# EAGLE board Spectra Mirror Bottom Board Final (EAGLE 6.5.0)
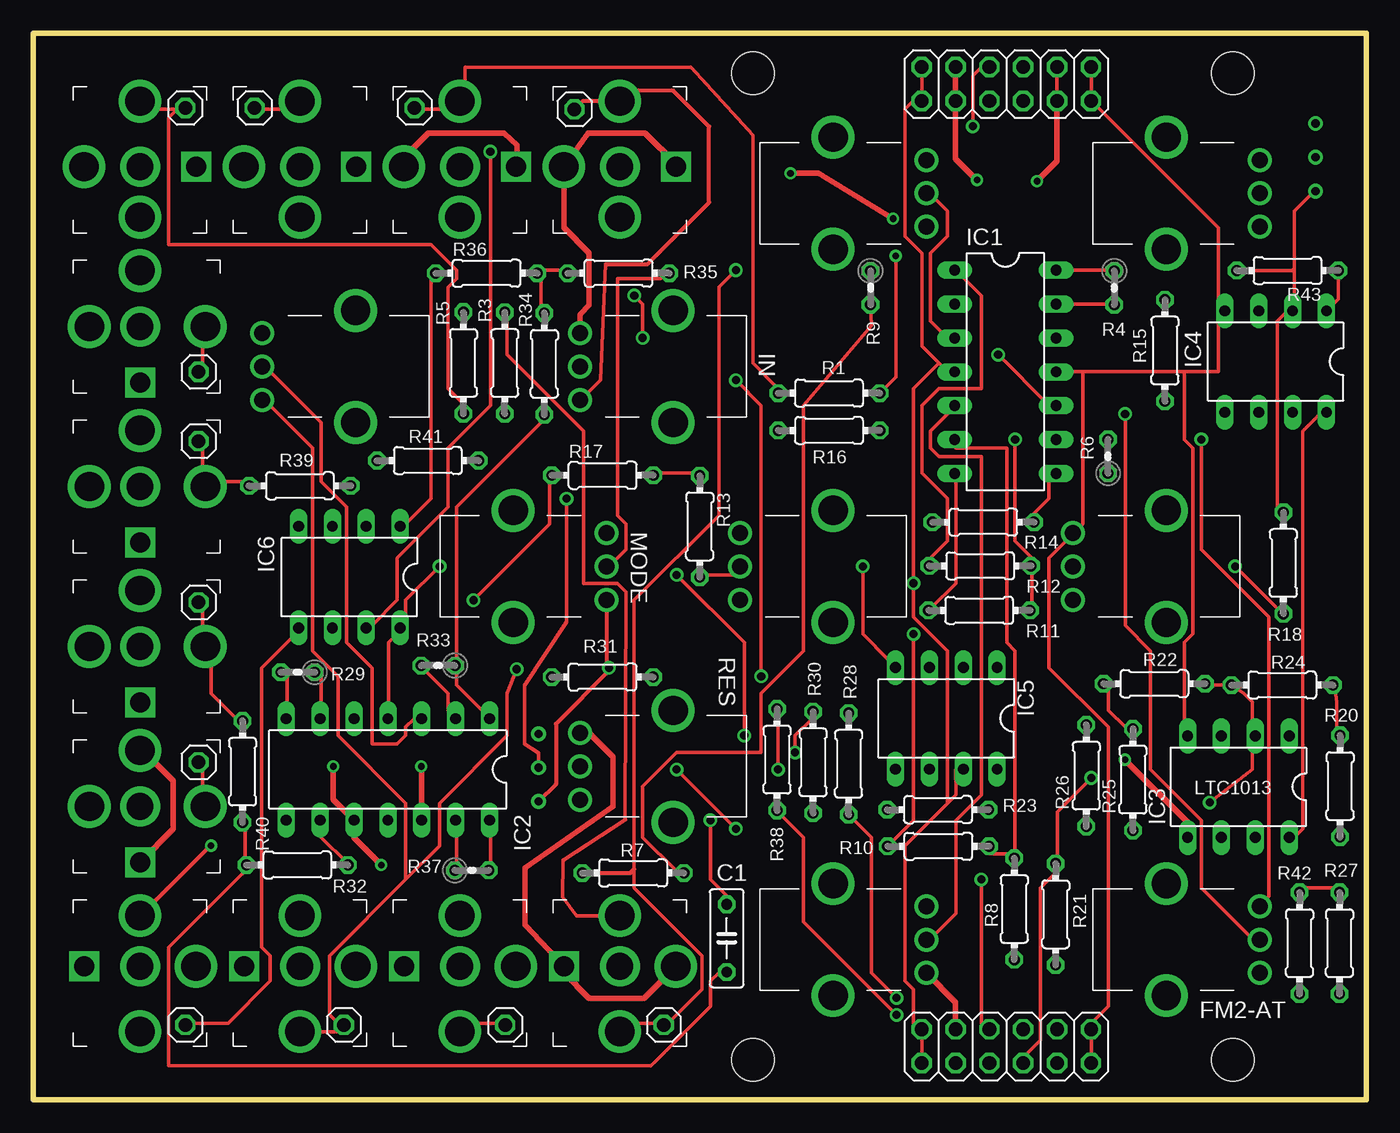
[diagram p0: board, top side]
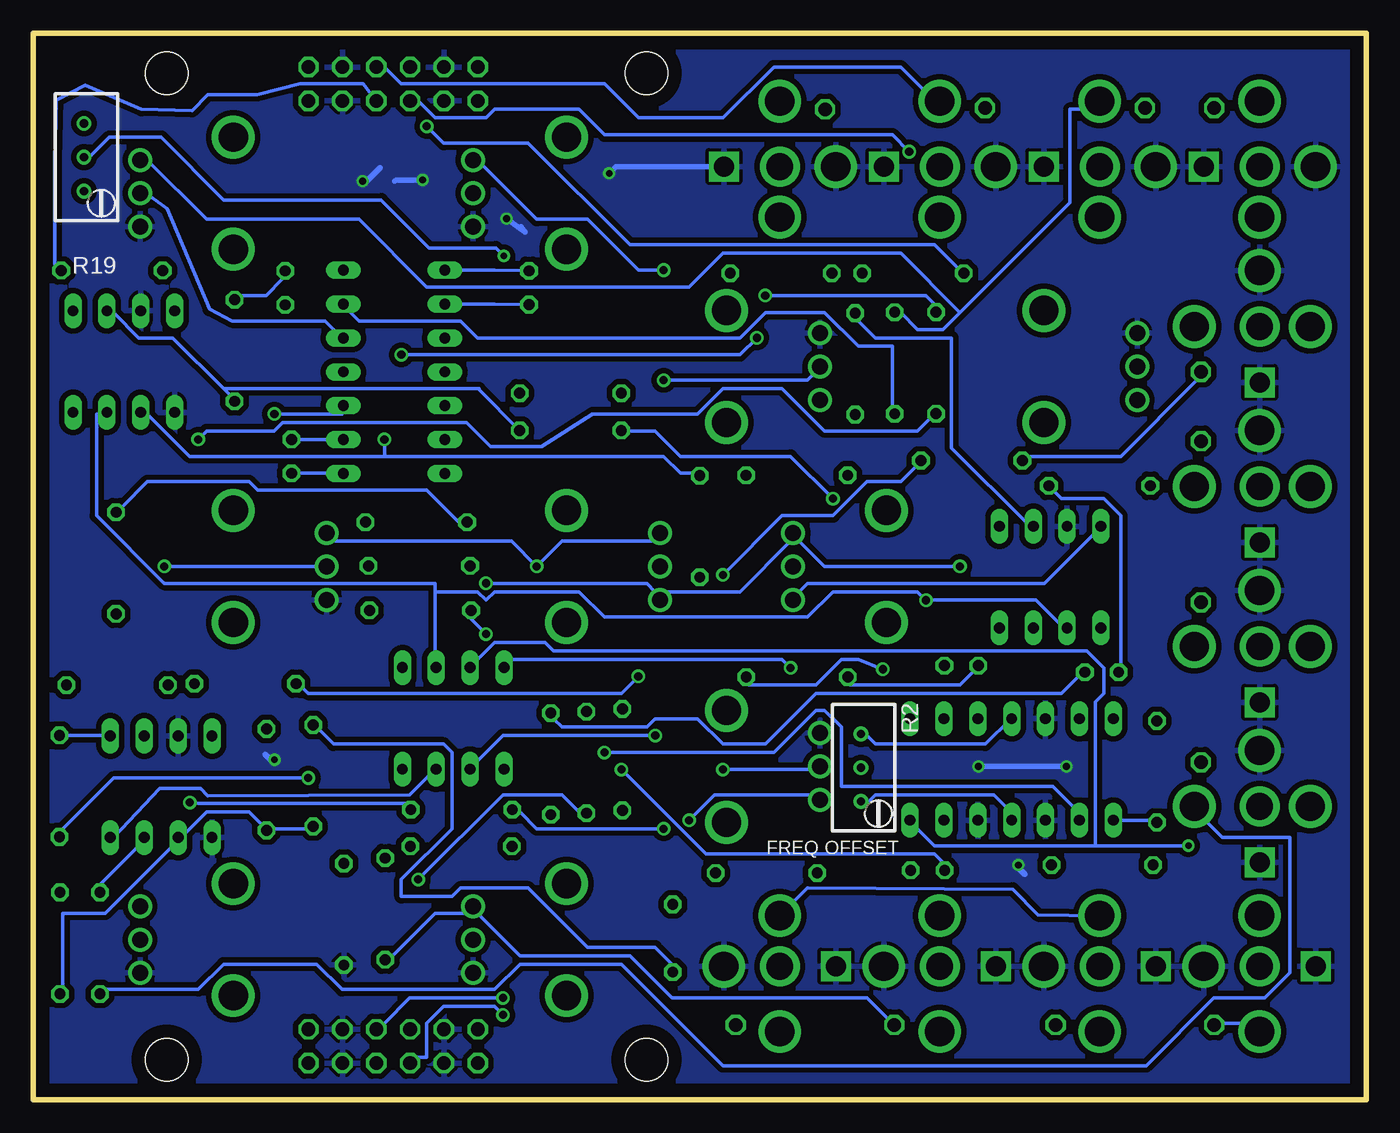
[diagram p1: board, bottom side, seen from below]

Size 100 x 80 mm. Coordinates in mm from the lower left corner, seen from the top.
Outline: 0,80 0,0 100,0 100,80 0,80
Copper layers (1*16): Top 0.035mm / dielectric 1.5mm / Bottom 0.035mm
Design rules "default *": minimum track width 10mil, minimum drill 24mil, track to track 8mil, track to pad 8mil, pad to pad 8mil, via to via 8mil, smd to smd 8mil, copper to edge 40mil, drill to drill 8mil, minimum pad ring 10mil, minimum via ring 8mil, stop-mask expansion 4mil, vias tented up to drill 25mil, thermal gap 10mil
Holes 3.2 mm at 54,3 90,3 54,77 90,77

## Footprints (pad centres in the part's own frame; a part is rotated, then mirrored left to right if it is on the bottom)
C050-025X075 = drill 0.813 octagon: 1 -2.54,0; 2 2.54,0
ALPHAPOT_BOARDMOUNT = drill 1.2: LEFT -2.5,7; MID 0,7; RIGHT 2.5,7 | drill 2.2: LEFT-LEG -4.2,0; RIGHT-LEG 4.2,0
DIL14 = drill 0.813 long: 1 -7.62,-3.81; 2 -5.08,-3.81; 3 -2.54,-3.81; 4 0,-3.81; 5 2.54,-3.81; 6 5.08,-3.81; 7 7.62,-3.81; 8 7.62,3.81; 9 5.08,3.81; 10 2.54,3.81; 11 0,3.81; 12 -2.54,3.81; 13 -5.08,3.81; 14 -7.62,3.81
DIL08 = drill 0.813 pad 1.27 long: 1 -3.81,-3.81; 2 -1.27,-3.81; 3 1.27,-3.81; 4 3.81,-3.81; 5 3.81,3.81; 6 1.27,3.81; 7 -1.27,3.81; 8 -3.81,3.81
2X06 = drill 1.016 octagon: 1 -6.35,-1.27; 2 -6.35,1.27; 3 -3.81,-1.27; 4 -3.81,1.27; 5 -1.27,-1.27; 6 -1.27,1.27; 7 1.27,-1.27; 8 1.27,1.27; 9 3.81,-1.27; 10 3.81,1.27; 11 6.35,-1.27; 12 6.35,1.27
1X01 = drill 1.016 octagon: 1 0,0
0204/7 = drill 0.813 octagon: 1 -3.81,0; 2 3.81,0
RTRIMT93YA = drill 0.61: 1 0,-2.54; 2 0,0; 3 0,2.54
0204V = drill 0.813 octagon: 1 -1.27,0; 2 1.27,0
KOBICONPJ-301 = drill 1.5 pad 1.778 square: GND 4.2,0 | drill 2.2 pad 2.54: GND2 -4.2,0; IN 0,4.9; SWITCH 0,-3.8 | drill 2 pad 2.54: P$1 0,0

## Placement (x,y rotation side)
C1  10n  [C050-025X075]  52.02,12.1 90 top
COURSE  B100k  [ALPHAPOT_BOARDMOUNT]  85,40 90 top
FM1-AT  B100k  [ALPHAPOT_BOARDMOUNT]  85,68 270 top
FM2-AT  B100k  [ALPHAPOT_BOARDMOUNT]  85,12 270 top
IC1  TL074P  [DIL14]  72.93,54.6 270 top
IC2  TL074P  [DIL14]  26.6,24.77 180 top
IC3  TL072P  [DIL08]  90.41,23.47 180 top
IC4  TL072P  [DIL08]  93.21,55.37 180 top
IC5  TL071P  [DIL08]  68.5,28.6 180 top
IC6  TL072P  [DIL08]  23.71,39.2 180 top
IN  B100k  [ALPHAPOT_BOARDMOUNT]  48,55 90 top
JP1  [2X06]  73,76.2 0 top
JP2  [2X06]  73,4 0 top
JP3  [1X01]  12.4,25.3 0 top
JP4  [1X01]  40.6,74.3 0 top
JP5  [1X01]  16.6,74.4 0 top
JP6  [1X01]  28.6,74.4 0 top
JP7  [1X01]  11.4,74.4 0 top
JP8  [1X01]  47.3,5.6 0 top
JP9  [1X01]  35.4,5.6 0 top
JP10  [1X01]  23.3,5.6 0 top
JP11  [1X01]  12.4,54.6 0 top
JP12  [1X01]  12.4,37.3 0 top
JP13  [1X01]  12.4,49.4 0 top
JP14  [1X01]  11.4,5.6 0 top
MODE  B100k  [ALPHAPOT_BOARDMOUNT]  36,40 270 top
MODE-AT  B100K  [ALPHAPOT_BOARDMOUNT]  24.18,55 90 top
PW  B100k  [ALPHAPOT_BOARDMOUNT]  60,40 90 top
PWM1-AT  B100k  [ALPHAPOT_BOARDMOUNT]  60,68 270 top
PWM2-AT  B100k  [ALPHAPOT_BOARDMOUNT]  60,12 270 top
R1  150k  [0204/7]  59.7,53 180 top
R2  100k  [RTRIMT93YA]  37.9,24.9 180 bottom
R3  220k  [0204/7]  35.37,55.26 90 top
R4  220k  [0204V]  81.1,60.9 270 top
R5  220k  [0204/7]  32.27,55.27 270 top
R6  220k  [0204V]  80.63,48.26 90 top
R7  220k  [0204/7]  45,17 180 top
R8  220k  [0204/7]  73.6,14.3 270 top
R9  220k  [0204V]  62.81,60.91 270 top
R10  220k  [0204/7]  67.9,19 0 top
R11  100k  [0204/7]  70.97,36.7 180 top
R12  100k  [0204/7]  71.04,40.04 180 top
R13  220k  [0204/7]  50,43 270 top
R14  100k  [0204/7]  71.27,43.32 0 top
R15  100k  [0204/7]  84.9,56.2 90 top
R16  100k  [0204/7]  59.7,50.2 180 top
R17  220k  [0204/7]  42.71,46.84 0 top
R18  100k  [0204/7]  93.79,40.25 90 top
R19  300k  [RTRIMT93YA]  96.2,70.7 180 bottom
R20  22k  [0204/7]  98.04,23.52 270 top
R21  1k  [0204/7]  76.7,13.9 270 top
R22  100k  [0204/7]  84.1,31.2 180 top
R23  100k  [0204/7]  67.87,21.75 180 top
R24  100k  [0204/7]  93.7,31.1 180 top
R25  100k  [0204/7]  82.5,24 90 top
R26  100k  [0204/7]  79,24.3 90 top
R27  100k  [0204/7]  98,11.73 270 top
R28  1k  [0204/7]  61.17,25.19 90 top
R29  22k  [0204V]  19.84,32.06 180 top
R30  1k  [0204/7]  58.5,25.3 90 top
R31  220k  [0204/7]  42.7,31.7 0 top
R32  220k  [0204/7]  19.8,17.6 180 top
R33  220k  [0204V]  30.37,32.56 180 top
R34  100k  [0204/7]  38.34,55.2 270 top
R35  220k  [0204/7]  43.9,62 0 top
R36  220k  [0204/7]  34,62 0 top
R37  100k  [0204V]  32.9,17.2 0 top
R38  22k  [0204/7]  55.8,25.5 90 top
R39  1k  [0204/7]  20,46.05 180 top
R40  1k  [0204/7]  15.7,24.6 90 top
R41  1k  [0204/7]  29.6,47.94 180 top
R42  1k  [0204/7]  95,11.73 270 top
R43  100k  [0204/7]  94.1,62.2 180 top
RES  B100k  [ALPHAPOT_BOARDMOUNT]  48,25 90 top
U$1  KOBICONPJ-301  [KOBICONPJ-301]  44,70 0 top
U$2  KOBICONPJ-301  [KOBICONPJ-301]  32,70 0 top
U$3  KOBICONPJ-301  [KOBICONPJ-301]  20,70 0 top
U$4  KOBICONPJ-301  [KOBICONPJ-301]  8,70 0 top
U$5  KOBICONPJ-301  [KOBICONPJ-301]  8,58 270 top
U$6  KOBICONPJ-301  [KOBICONPJ-301]  8,46 270 top
U$7  KOBICONPJ-301  [KOBICONPJ-301]  8,34 270 top
U$8  KOBICONPJ-301  [KOBICONPJ-301]  8,22 270 top
U$9  KOBICONPJ-301  [KOBICONPJ-301]  8,10 180 top
U$10  KOBICONPJ-301  [KOBICONPJ-301]  20,10 180 top
U$11  KOBICONPJ-301  [KOBICONPJ-301]  32,10 180 top
U$12  KOBICONPJ-301  [KOBICONPJ-301]  44,10 180 top

## Library data of the parts
C1 R2 R19 = rcl
COURSE FM1-AT FM2-AT IN MODE MODE-AT PW PWM1-AT PWM2-AT RES U$1-U$12 = elipech_modified
IC1-IC6 = linear
JP1-JP14 = pinhead
R1 R3-R18 R20-R43 = resistor

## Nets
CLOCK-INPUT: IC6.7 JP1.5
COMP-THRESH: IC4.7 IC5.2 IC6.6 R17.1
FREQ-INPUT: IC4.1 JP1.7 R43.1
GND: COURSE.LEFT FM1-AT.RIGHT FM2-AT.RIGHT IC2.5 IC2.10 IC2.12 IC3.3 IC3.5 IC4.3 IC4.5 IC6.3 IN.RIGHT JP1.3 JP1.4 JP1.9 JP1.10 JP2.3 JP2.4 JP2.9 JP2.10 MODE-AT.RIGHT PWM1-AT.RIGHT PWM2-AT.RIGHT R21.2 RES.RIGHT U$1.GND U$1.GND2 U$2.GND U$2.GND2 U$3.GND U$3.GND2 U$4.GND U$4.GND2 U$5.GND U$5.GND2 U$6.GND U$6.GND2 U$7.GND U$7.GND2 U$8.GND U$8.GND2 U$9.GND U$9.GND2 U$10.GND U$10.GND2 U$11.GND U$11.GND2 U$12.GND U$12.GND2
KJDNFKDNF: IC1.13 R3.1 R4.2
N$1: R1.1 R19.2
N$2: R2.2 R16.2
N$4: IC5.6 R41.1
N$5: IC1.14 R4.1 R15.2
N$6: FM1-AT.MID IC1.12
N$7: FM2-AT.MID IC1.10 R5.1
N$8: IC1.9 R6.2
N$9: FM2-AT.LEFT JP7.1 R5.2 U$4.IN
N$10: IC1.8 R6.1 R14.2
N$11: JP9.1 PWM2-AT.LEFT R8.2 U$11.IN
N$12: IC1.6 R8.1 R10.2
N$13: JP8.1 PWM1-AT.LEFT R7.2 U$12.IN
N$14: IC1.2 R7.1 R9.2
N$15: IC1.1 R9.1 R12.2
N$16: IC1.3 PWM1-AT.MID
N$17: IC1.5 PWM2-AT.MID
N$18: IC1.7 R10.1 R11.2
N$19: IC4.6 R11.1 R12.1 R13.1 R17.2
N$20: PW.MID R13.2
N$21: IC4.2 R14.1 R15.1 R16.1 R18.2 R19.3 R43.2
N$22: COURSE.MID R18.1
N$24: JP10.1 MODE-AT.LEFT R31.2 U$10.IN
N$26: IN.LEFT JP4.1 U$1.IN
N$27: IN.MID R22.2 R25.2
N$28: IC3.6 R25.1 R26.1 R27.2
N$29: IC3.1 R20.1 R24.1
N$30: IC2.2 R31.1 R33.2
N$31: IC3.2 R22.1 R23.1 R24.2
N$32: IC3.7 R27.1 R42.1
N$33: R23.2 RES.MID
N$34: IC2.1 R33.1 R34.2
N$35: IC2.9 R30.2 R32.1
N$36: IC2.3 MODE-AT.MID
N$37: IC2.6 R28.2 R29.1
N$38: C1.2 RES.LEFT
N$39: IC6.2 R34.1 R35.1 R36.2
N$40: IC2.13 R37.1 R38.2
N$42: IC2.14 IC5.3 R37.2 U$9.SWITCH
N$43: MODE.MID R35.2
N$44: IC6.5 JP14.1 U$9.IN
N$45: JP11.1 R41.2 U$5.IN
N$46: JP12.1 R40.2 U$7.IN
N$47: JP13.1 R39.2 U$6.IN
N$48: JP3.1 R42.2 U$8.IN
NORMALIZE: FM1-AT.LEFT JP5.1 R3.2 U$3.IN U$10.SWITCH U$12.SWITCH
NOTE-INPUT: JP1.8 JP6.1 R1.2 U$2.IN
OSC: JP2.5 R38.1
SAH: JP2.8 R28.1
SAH-INPUT: JP2.7 R20.2 R21.1
SAH-OUT: IC2.7 R29.2 R39.1
VCA: JP2.6 R30.1
VCA-INPUT: IC6.1 JP1.6 R36.1
VCA-OUT: C1.1 IC2.8 R26.2 R32.2 R40.1
VDD: IC1.4 IC2.4 IC3.8 IC4.8 IC5.7 IC6.8 JP1.1 JP1.2 JP2.1 JP2.2 MODE.LEFT PW.LEFT R2.1
VSS: COURSE.RIGHT IC1.11 IC2.11 IC3.4 IC4.4 IC5.4 IC6.4 JP1.11 JP1.12 JP2.11 JP2.12 MODE.RIGHT PW.RIGHT R2.3

## Tracks (layer width: path | path; a pad name or v marks a point on that pad's centre or on a via)
CLOCK-INPUT  (via drill 0.61)
  Top 0.254: v34.29,71.12 34.29,52.07 31.11,48.9 31.11,44.45 27.3,40.64 27.3,37.47 25.4,35.56 IC6.7
  Bottom 0.254: v34.29,71.12 35.56,72.39 57.15,72.39 59.05,74.3 65.41,74.3 66.04,73.66 69.85,73.66 71.12,74.93 JP1.5
COMP-THRESH  (via drill 0.61)
  Top 0.254: v33.02,37.47 38.73,43.18 38.73,46.35 R17.1
  Bottom 0.254: IC6.6 22.86,35.56 24.77,37.47 v33.02,37.47 33.66,38.1 40.01,38.1 41.91,36.2 57.15,36.2 59.05,38.1 65.41,38.1 66.04,37.47 66.67,38.1 69.85,38.1 | 69.85,38.1 69.85,38.73 90.17,38.73 95.25,43.81 95.25,51.44 94.61,51.44 IC4.7 | 69.85,38.1 69.85,33.02 IC5.2
FREQ-INPUT
  Top 0.254: R43.1 97.91,60.07 IC4.1
  Bottom 0.254: JP1.7 75.27,76.23 76.6,76.2 80,76.2 83.2,75.4 86.9,75.4 88.1,74.2 91.9,74.3 96.1,76.1 98.3,75 98.4,70.5 98.4,62.69 R43.1
GND  (via drill 0.5)
  Top 0.254: JP1.9 JP1.10
  Top 0.406: JP1.4 JP1.3 69.19,70.61 v70.8,69 | JP1.9 76.81,70.41 v75.3,68.9 | IN.RIGHT 41,58.9 41.7,59.6 41.7,63.5 39.8,65.4 U$1.GND2 41.6,72.5 45.9,72.5 48.2,70.2 U$1.GND | U$2.GND2 27.8,70.7 29.6,72.5 35.3,72.5 36.3,71.6 36.3,70.4 U$2.GND | v56.8,69.5 58.9,69.5 v64.5,66.1 | RES.RIGHT 41.7,27.5 43.5,25.7 43.5,22 36.9,17.4 36.9,13.1 U$12.GND 39.8,9.5 41.7,7.6 45.8,7.6 U$12.GND2 | JP2.4 69.19,7.31 PWM2-AT.RIGHT | IC3.5 86.6,20.8 v81.9,25.5 | IC2.12 29.14,24.96 v29.1,25 | v22.5,25 22.5,22.52 IC2.10 24.06,19.64 v26.1,17.6 | U$8.GND2 8.2,26.2 10.5,23.9 10.5,20.3 U$8.GND
  Bottom 0.406: v70.8,69 72.8,69 72.9,68.9 | v75.3,68.9 75,68.9 74,69.9 | U$1.GND 56.3,70 v56.8,69.5 | v64.5,66.1 63.1,65.1 63.4,65.5 | v81.9,25.5 82.2,25.5 82.6,25.9 | v29.1,25 v22.5,25 | v26.1,17.6 26.1,17.4 25.6,16.9
  pour Bottom (isolate 0.406): -3,81 -3,-3 103,-3 103,-1 103,83 -3,83
KJDNFKDNF
  Top 0.254: R4.2 80.64,59.69 76.83,59.69 IC1.13
  Bottom 0.254: R3.1 35.56,52.07 35.56,56.52 38.1,56.52 40.64,59.05 45.09,59.05 46.99,57.15 66.67,57.15 67.94,58.42 75.56,58.42 76.2,59.05 IC1.13
N$1  (via drill 0.5)
  Top 0.254: v64.7,63.3 64.7,54.19 R1.1
  Bottom 0.254: R19.2 95.8,70.7 94.3,72.2 90.4,72.2 85.7,67.5 73.9,67.5 70.3,63.9 65.3,63.9 v64.7,63.3
N$2  (via drill 0.61)
  Top 0.254: v40.01,45.09 40.01,35.81 36.87,31.08 36.87,26.67 37.9,26 R2.2
  Bottom 0.254: v40.01,45.09 43.18,48.26 51.44,48.26 53.34,50.16 55.88,50.16 R16.2
N$4  (via drill 0.61)
  Top 0.254: v48.26,39.37 53.34,34.29 v53.34,27.3
  Bottom 0.254: v48.26,39.37 43.81,43.81 40.01,43.81 37.47,46.35 34.92,46.35 33.66,47.62 R41.1 | v53.34,27.3 64.77,27.3 66.67,25.4 IC5.6
N$5
  Top 0.254: IC1.14 76.83,62.23 80.64,62.23 R4.1
  Bottom 0.254: R4.1 81.28,61.59 82.55,60.33 84.45,60.33 R15.2
N$6
  Bottom 0.254: IC1.12 76.83,57.15 78.11,58.42 85.09,58.42 86.77,59.3 89.97,66.84 91.44,67.94 FM1-AT.MID
N$7  (via drill 0.61)
  Top 0.254: v45.09,60.33 45.72,59.69 v45.72,57.15 | v72.39,55.88 76.2,52.07 IC1.10 | v81.92,51.44 81.92,35.56 83.82,33.66 83.82,24.77 87.63,20.95 87.63,15.88 91.44,12.06 FM2-AT.MID
  Bottom 0.254: v45.09,60.33 33.02,60.33 32.38,59.69 R5.1 | v45.72,57.15 46.99,55.88 v72.39,55.88 | v81.92,51.44 76.83,51.44 IC1.10
N$8
  Bottom 0.254: R6.2 76.83,49.53 IC1.9
N$9  (via drill 0.61)
  Top 0.254: 10.79,74.3 10.16,73.66 10.16,64.14 29.84,64.14 31.75,62.23 31.75,61.59 31.11,60.96 31.11,53.34 32.38,52.07 R5.2 | v87.63,49.53 87.63,41.27 92.71,36.2 92.71,15.24 92.08,14.61 FM2-AT.LEFT | 10.79,74.3 8.26,74.3 U$4.IN | 10.79,74.3 JP7.1
  Bottom 0.254: v87.63,49.53 87,50.16 81.92,50.16 81.28,50.8 67.5,50.8 65.7,49 61.87,49 58.03,51.44 50.16,51.44 48.26,53.34 43.81,53.34 40.64,50.16 33.66,50.16 32.38,51.44 R5.2
N$10
  Top 0.254: R14.2 74.93,43.81 76.2,45.09 76.2,46.35 IC1.8
  Bottom 0.254: R6.1 76.83,46.99 IC1.8
N$11
  Top 0.254: JP9.1 34.92,5.71 32.38,5.71 U$11.IN
  Bottom 0.254: R8.2 73.03,10.79 69.85,13.97 67.31,13.97 PWM2-AT.LEFT 66.67,13.97 63.5,10.79 55.24,10.79 52.07,7.62 37.47,7.62 35.56,5.71 JP9.1
N$12
  Top 0.254: R10.2 71.75,18.41 73.03,18.41 R8.1 73.66,18.41 73.66,33.66 73.03,34.29 73.03,48.9 69.22,48.9 IC1.6
N$13  (via drill 0.61)
  Top 0.254: U$12.IN 44.45,5.71 46.99,5.71 JP8.1 47.62,5.71 50.16,8.26 50.16,10.79 45.09,15.88 45.09,17.3 45.09,37.47 51.44,43.81 51.44,60.96 v52.7,62.23
  Top 0.305: R7.2 44.78,17 45.09,17.3
  Bottom 0.254: v52.7,62.23 54.61,62.23 58.42,66.04 62.23,66.04 66.67,70.48 PWM1-AT.LEFT
N$14
  Top 0.254: R7.1 48.26,17.14 45.72,19.68 45.72,23.5 48.26,26.04 54.61,26.04 54.61,30.48 57.78,33.66 57.78,52.07 62.87,58.05 R9.2
  Bottom 0.254: IC1.2 68.58,59.69 65.41,59.69 R9.2
N$15
  Top 0.254: R12.2 67.31,40.64 68.58,41.91 68.58,45.09 66.67,46.99 66.67,52.07 67.94,53.34 71.12,53.34 71.12,60.33 69.22,62.23 IC1.1
  Bottom 0.254: R9.1 65.41,62.23 68.58,62.23 IC1.1
N$16
  Top 0.254: IC1.3 68.58,57.15 67.31,58.42 67.31,63.5 68.58,64.77 68.58,66.67 67.31,67.94 PWM1-AT.MID
N$17
  Top 0.254: IC1.5 68.58,51.44 67.31,50.16 67.31,48.9 67.94,48.26 71.12,48.26 71.12,22.86 69.22,20.95 69.22,13.97 67.31,12.06 PWM2-AT.MID
N$18  (via drill 0.61)
  Top 0.254: v66.04,34.92 66.04,20.95 64.14,19.05 R10.1 | IC1.7 69.22,46.35 69.22,38.73 67.31,36.83 R11.2
  Bottom 0.254: v66.04,34.92 67.31,36.2 R11.2
N$19  (via drill 0.61)
  Top 0.254: R11.1 74.93,36.83 74.93,40.01 R12.1 74.93,40.64 73.66,41.91 v73.66,49.53 | R17.2 46.99,46.99 49.53,46.99 R13.1
  Bottom 0.254: 73.66,48.26 52.7,48.26 51.44,46.99 50.16,46.99 R13.1 | 73.66,48.26 88.27,48.26 91.44,51.44 IC4.6 | 73.66,48.26 v73.66,49.53
N$20
  Top 0.254: R13.2 50.16,39.37 52.7,39.37 PW.MID
N$21
  Top 0.254: 94.61,62.4 94.61,59.69 IC4.2 93.98,59.05 93.34,58.42 93.34,44.45 R18.2 | 94.61,62.4 94.61,66.67 95.89,67.94 R19.3 | R43.2 94.42,62.2 94.61,62.4
  Bottom 0.254: R14.1 67.94,43.18 70.48,45.72 83.19,45.72 83.82,46.35 91.44,46.35 93.34,44.45 R18.2 | 85.72,53.34 89.53,57.15 92.08,57.15 93.98,59.05 IC4.2 | 85.72,53.34 85.09,52.7 R15.1 | 85.72,53.34 66.57,53.34 66.57,53.26 R16.1
N$22  (via drill 0.61)
  Top 0.254: v90.17,40.01 93.34,36.83 R18.1
  Bottom 0.254: v90.17,40.01 78.11,40.01 COURSE.MID
N$24  (via drill 0.61)
  Top 0.254: v36.27,32.28 35.56,30.48 35.56,27.3 30.48,22.23 30.48,19.05 27.94,16.51 | 27.94,16.51 22.23,10.79 22.23,6.35 22.86,5.71 JP10.1 22.86,5.08 20.32,5.08 U$10.IN | 27.94,16.51 27.94,22.23 22.86,27.3 22.86,31.75 20.95,33.66 20.95,48.9 17.78,52.07 MODE-AT.LEFT
  Bottom 0.254: v36.27,32.28 38.1,33.02 39.37,33.02 41.27,31.11 46.35,31.11 R31.2
N$26
  Top 0.254: 40.64,74.3 JP4.1 | 42.95,62.67 42.55,53.98 41.27,52.7 IN.LEFT
  Top 0.305: 42.95,62.67 46.07,62.67 50.7,67.3 50.7,73 48,75.7 44.8,75.7 U$1.IN 41.2,74.9 JP4.1
N$27  (via drill 0.61)
  Top 0.254: R25.2 81.92,27.94 80.64,29.21 80.64,31.11 R22.2 | v52.7,53.98 54.61,52.07 v54.61,31.75
  Bottom 0.254: v52.7,53.98 41.91,53.98 41.27,54.61 IN.MID | v54.61,31.75 55.88,30.48 79.38,30.48 80.01,31.11 R22.2
N$28
  Bottom 0.254: R26.1 79.38,20.32 81.92,20.32 R25.1 82.55,20.32 83.82,21.59 87,21.59 88.9,19.68 IC3.6 89.53,19.05 94.61,13.97 97.79,13.97 97.79,8.26 R27.2
N$29
  Top 0.254: R24.1 97.72,30.38 97.79,29.84 97.79,27.94 R20.1
  Bottom 0.254: IC3.1 94.61,27.3 97.79,27.3 R20.1
N$30
  Top 0.254: R33.2 29.21,32.38 31.11,30.48 31.11,29.21 IC2.2
  Bottom 0.254: R31.1 38.73,31.11 30.48,31.11 29.21,32.38 R33.2
N$31  (via drill 0.61)
  Top 0.254: R22.1 88.27,31.11 90.17,31.11 R24.2 90.81,30.48 91.44,29.84 91.44,27.3 IC3.2 91.44,26.67 91.44,24.77 v88.27,22.29
  Bottom 0.254: v88.27,22.29 87.63,22.23 71.75,22.23 R23.1
N$32
  Top 0.254: R42.1 95.25,15.88 97.79,15.88 R27.1
  Bottom 0.254: IC3.7 92.08,19.05 95.25,15.88 R42.1
N$33  (via drill 0.61)
  Top 0.254: v48.26,24.77 v52.7,20.32
  Bottom 0.254: v52.7,20.32 62.23,20.32 63.5,21.59 R23.2 | v48.26,24.77 41.27,24.77 RES.MID
N$34
  Top 0.254: IC2.1 33.66,29.21 31.75,31.11 31.75,32.38 R33.1 31.75,33.02 31.75,44.45 38.1,50.8 R34.2
N$35  (via drill 0.61)
  Top 0.254: R32.1 23.5,17.78 21.59,19.68 21.59,20.95 IC2.9 | v57.15,26.04 57.15,27.3 58.42,28.57 R30.2
  Bottom 0.254: v57.15,26.04 44.45,26.04 41.27,29.21 40.64,29.21 39.37,27.94 39.37,23.5 23.5,23.5 21.59,21.59 IC2.9
N$36
  Top 0.254: IC2.3 28.57,28.57 27.94,27.94 27.94,27.3 27.3,26.67 25.4,26.67 25.4,32.38 23.5,34.29 23.5,44.45 21.59,46.35 21.59,50.8 17.78,54.61 MODE-AT.MID
N$37
  Top 0.254: IC2.6 21.59,29.21 21.59,31.75 R29.1
  Bottom 0.254: R28.2 60.96,28.57 60.33,27.94 53.98,27.94 53.34,28.57 50.16,28.57 48.26,26.67 45.09,26.67 41.27,30.48 22.86,30.48 21.59,31.75 R29.1
N$38  (via drill 0.61)
  Top 0.254: v50.8,20.95 50.8,16.51 52.07,15.24 C1.2
  Bottom 0.254: v50.8,20.95 48.9,22.86 41.27,22.86 RES.LEFT
N$39
  Top 0.254: R35.1 39.41,62.23 38.1,62.23 R36.2 38.1,61.59 38.1,59.05 R34.1
  Bottom 0.254: IC6.2 25.4,43.18 31.11,48.9 31.11,57.15 36.83,57.15 38.1,58.42 R34.1
N$40  (via drill 0.61)
  Top 0.254: R37.1 31.75,17.78 31.75,20.95 IC2.13 | v55.88,24.77 55.88,29.21 R38.2
  Bottom 0.254: v55.88,24.77 49.53,18.41 32.38,18.41 31.75,17.78 R37.1
N$42  (via drill 0.5)
  Top 0.254: R37.2 34.29,17.78 34.29,20.95 IC2.14
  Top 0.305: v13.34,19.05 13.25,19.05 U$9.SWITCH
  Bottom 0.254: 20.32,19.05 20.32,29.84 19.68,30.48 19.68,32.38 20.95,33.66 60.96,33.66 61.59,34.29 65.41,34.29 66.67,33.02 IC5.3 | 20.32,19.05 32.38,19.05 34.29,20.95 IC2.14 | 20.32,19.05 v13.34,19.05
N$43
  Top 0.254: R35.2 47.02,61.59 43.81,61.59 43.81,43.81 44.45,43.18 44.45,41.27 43.18,40.01 MODE.MID
N$44
  Top 0.254: IC6.5 19.68,34.92 17.14,32.38 17.14,11.43 17.78,10.79 17.78,8.89 14.61,5.71 11.43,5.71 JP14.1
  Bottom 0.254: U$9.IN 8.26,5.71 10.79,5.71 JP14.1
N$45
  Top 0.254: U$5.IN 12.7,57.78 12.7,54.61 JP11.1
  Bottom 0.254: R41.2 25.4,48.26 18.41,48.26 12.7,53.98 JP11.1
N$46
  Top 0.254: R40.2 15.24,28.57 13.34,30.48 13.34,33.66 U$7.IN 12.7,34.29 12.7,36.83 JP12.1
N$47
  Top 0.254: R39.2 15.88,46.35 13.34,46.35 U$6.IN 12.7,46.35 12.7,48.9 JP13.1
N$48
  Top 0.254: JP3.1 12.7,24.77 12.7,22.23 U$8.IN
  Bottom 0.254: R42.2 94.61,8.26 87.63,8.26 85.72,10.16 78.74,10.16 76.83,8.26 65.41,8.26 63.5,10.16 55.88,10.16 48.26,2.54 16.51,2.54 11.43,7.62 7.62,7.62 5.71,9.53 5.71,19.68 10.79,19.68 12.7,21.59 U$8.IN
NORMALIZE
  Top 0.254: JP5.1 17.14,74.3 19.68,74.3 U$3.IN | 44.4,21 44.45,38.1 43.81,38.73 41.27,38.73 41.27,50.16 35.56,55.88 35.56,59.05 R3.2 | 39.75,17.95 39.7,15.2 40.75,13.77 U$12.SWITCH
  Top 0.305: 39.75,17.95 44.4,21
  Bottom 0.254: U$10.SWITCH 24.62,13.87 26.52,15.78 41.91,15.88 43.81,13.97 U$12.SWITCH | 30.48,59.05 22.23,67.31 22.23,74.3 20.32,74.3 U$3.IN | 30.48,59.05 31.75,57.78 33.66,57.78 34.92,59.05 R3.2 | 30.48,59.05 34.92,63.5 48.26,63.5 50.8,60.96 70.48,60.96 75.56,66.04 87,66.04 91.44,70.48 FM1-AT.LEFT
NOTE-INPUT
  Top 0.254: R1.2 55.88,53.34 53.98,55.24 53.98,72.34 49.35,77.47 32.38,77.47 32.38,74.93 U$2.IN 31.75,74.3 29.21,74.3 JP6.1
  Bottom 0.254: JP1.8 73.66,77.47 72.39,76.2 57.15,76.2 54.61,73.66 48.26,73.66 44.45,77.47 34.92,77.47 32.38,74.93 U$2.IN
OSC  (via drill 0.61)
  Top 0.254: v64.77,6.35 57.78,13.34 57.78,19.68 55.88,21.59 R38.1
  Bottom 0.254: v64.77,6.35 65.41,6.99 69.22,6.99 70.48,5.71 70.48,3.17 71.12,3.17 JP2.5
SAH  (via drill 0.61)
  Top 0.254: R28.1 62.87,19.68 62.87,9.53 v64.77,7.62
  Bottom 0.254: v64.77,7.62 71.75,7.62 73.66,5.71 JP2.8
SAH-INPUT  (via drill 0.61)
  Top 0.254: JP2.7 74.3,3.17 75.56,4.45 75.56,15.88 76.83,17.14 R21.1 76.83,17.78 76.83,21.59 v79.38,24.13
  Bottom 0.254: v79.38,24.13 93.98,24.13 97.79,20.32 R20.2
SAH-OUT
  Top 0.254: IC2.7 19.05,29.21 19.05,31.75 R29.2
  Bottom 0.254: R39.1 23.5,45.72 22.86,45.09 19.68,45.09 18.41,43.81 18.41,32.38 R29.2
VCA  (via drill 0.61)
  Top 0.254: v71.12,16.51 71.12,5.71 JP2.6
  Bottom 0.254: v71.12,16.51 64.77,22.86 60.33,22.86 59.05,21.59 R30.1
VCA-INPUT  (via drill 0.61)
  Top 0.254: IC6.1 27.94,43.18 29.84,45.09 29.84,61.59 R36.1 | v70.48,73.03 70.48,76.83 71.12,77.47 JP1.6
  Bottom 0.254: v70.48,73.03 69.22,71.75 62.87,71.75 55.24,64.14 32.38,64.14 30.48,62.23 R36.1
VCA-OUT
  Top 0.254: C1.1 51.44,9.53 50.8,8.89 50.8,6.99 46.35,2.54 10.16,2.54 10.16,11.43 15.88,17.14 R32.2 15.88,17.78 15.88,20.32 R40.1
  Bottom 0.254: R40.1 15.88,20.95 18.41,20.95 IC2.8 | R26.2 78.74,27.94 77.47,26.67 69.22,26.67 68.58,26.04 68.58,20.32 72.39,16.51 72.39,15.24 68.58,15.24 67.94,15.88 62.87,15.88 58.42,11.43 53.34,11.43 52.07,10.16 C1.1
VDD  (via drill 0.61)
  Top 0.254: IC2.4 26.67,29.21 26.67,34.29 27.3,34.92 IC6.8 27.94,35.56 27.94,37.47 v30.48,40.01 | 67.94,55.24 66.67,56.52 66.67,63.5 65.41,64.77 65.41,74.3 66.04,74.93 JP1.1 66.67,74.93 66.67,77.47 JP1.2 | 67.94,55.24 68.58,54.61 IC1.4 | JP2.1 66.67,3.17 66.67,5.08 JP2.2 66.04,5.71 66.04,8.26 65.41,8.89 65.41,19.05 68.58,22.23 | IC4.8 96.52,51.44 95.25,50.16 95.25,20.32 94.61,19.68 IC3.8 | 68.58,22.23 69.22,22.86 69.22,24.77 IC5.7 | 67.94,55.24 66.04,53.34 v66.04,38.73 66.04,36.2 68.58,33.66 68.58,22.23
  Bottom 0.254: R2.1 37.47,27.3 36.83,26.67 28.57,26.67 26.67,28.57 IC2.4 | v30.48,40.01 40.64,40.01 42.55,41.91 MODE.LEFT 43.18,41.91 46.99,38.1 52.7,38.1 PW.LEFT 53.34,38.1 53.98,38.73 v66.04,38.73 | IC5.7 69.85,24.77 71.75,22.86 86.9,22.8 87.44,23.36 90.5,23.36 93.98,19.68 IC3.8
VSS  (via drill 0.61)
  Top 0.254: v62.23,40.01 62.23,34.92 64.14,33.02 IC5.4 | 79.38,74.93 79.38,77.47 JP1.12 | JP2.11 79.38,3.17 79.38,5.08 JP2.12 79.38,5.71 80.64,6.99 80.64,27.94 76.2,32.38 76.2,40.64 77.47,41.91 COURSE.RIGHT 78.11,42.55 78.74,43.18 78.74,54.61 | 86.36,54.61 88.9,54.61 88.9,59.05 IC4.4 88.9,59.69 88.9,65.41 79.38,74.93 | 86.36,54.61 78.74,54.61 | 78.74,54.61 76.83,54.61 IC1.11 | 86.36,54.61 86.36,49.53 87,48.9 87,34.92 86.36,34.29 86.36,27.3 IC3.4 | 79.38,74.93 JP1.11
  Top 0.305: MODE.RIGHT 43,32.56 v43.18,32.38 43.18,32.18 39.2,28.2 39.2,23.66 R2.3
  Bottom 0.254: R2.3 37.47,22.23 36.83,22.86 27.94,22.86 26.67,21.59 IC2.11 | IC6.4 20.32,42.55 24.13,38.73 41.91,38.73 42.55,38.1 MODE.RIGHT | PW.RIGHT 53.34,41.91 60.33,41.91 v62.23,40.01 64.14,41.91 77.47,41.91 COURSE.RIGHT | v43.18,32.38 43.81,33.02 64.14,33.02 IC5.4

## Text on the board
tNames: LTC1013
bNames: FREQ OFFSET
tValues: SOLDER THIS SIDE | FM2 | FM1 | NOTE | IN | PW1-AT | FM1-AT | B100K | B100K | MODE-AT | OSC-OUT | B100K | PW | FREQ | SAH-OUT | B100K | B100K | VCA-OUT | HIPS-OUT | B100K | PW2-AT | PW2 | PW1 | CLOCK | MODE | SOLDER THIS SIDE
bValues: 1V/O | www.MysticCircuits.com | 23B: SPECTRA MIRROR | Designed by Eli Pechman